# Altium PCB High Precision Laboratory Voltage Calibrator.PcbDoc
Units mm, origin at the board's own origin, x right, y up, seen from the top; angles counter-clockwise.
Board outline 80 x 60 mm, 2 copper layers (Top Layer, Bottom Layer); 18 components, 17 nets, 52 pads, 0 vias.
Unrouted connection lines stored in the file: 35.
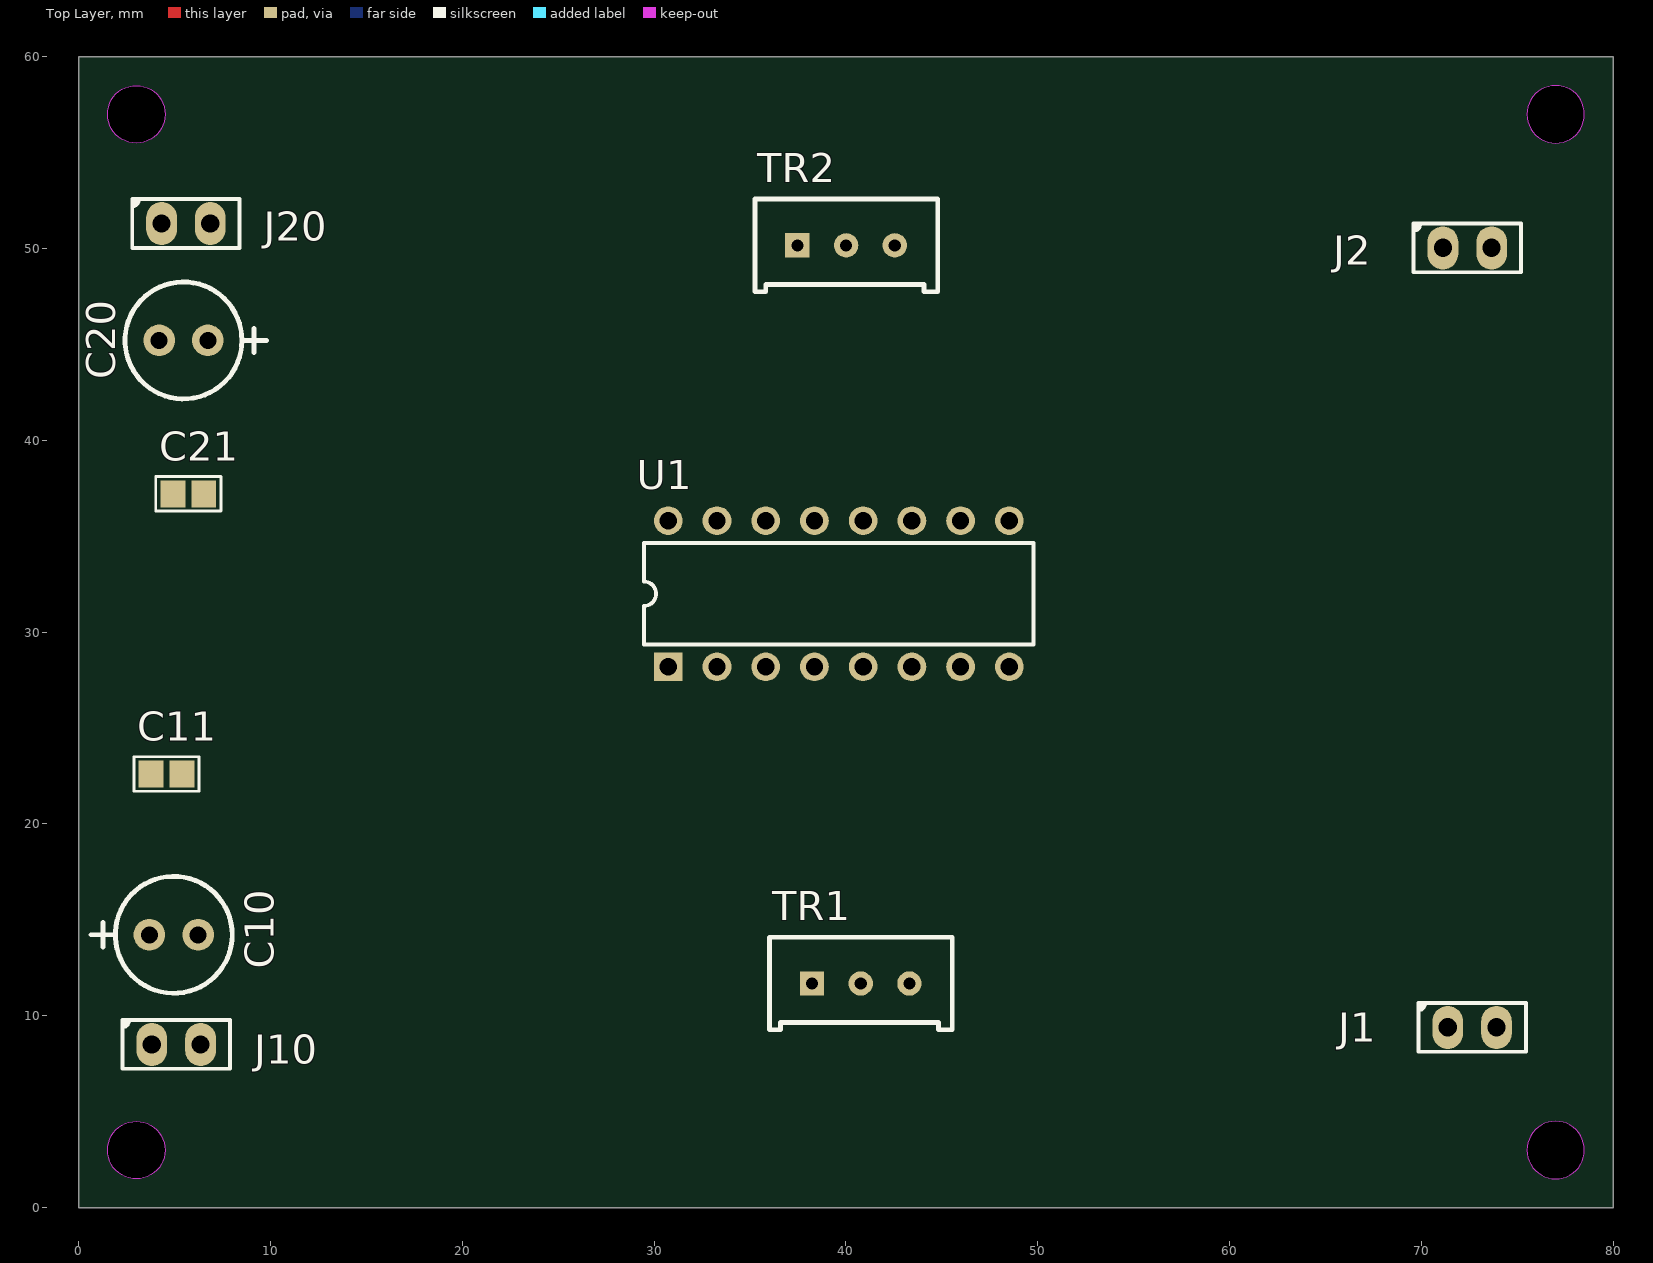
[diagram p0: Top Layer view]
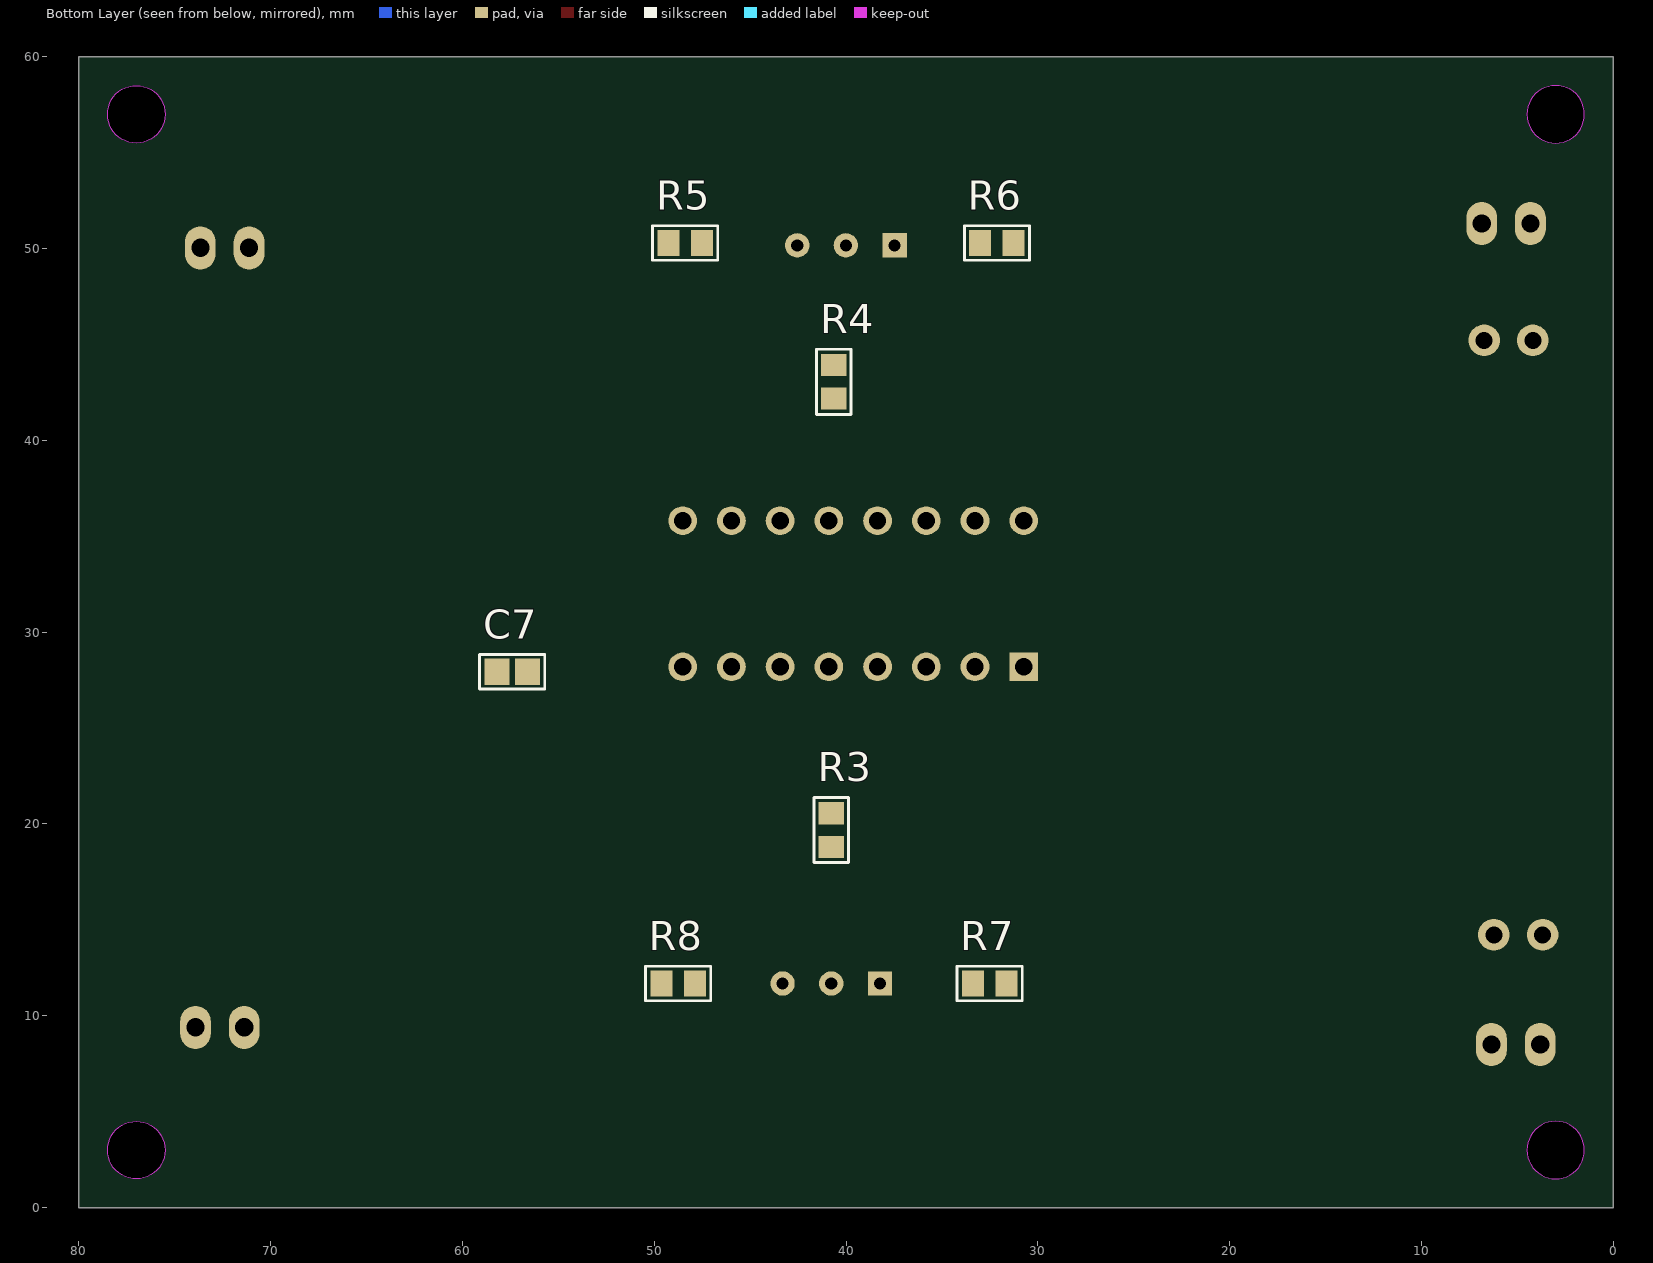
[diagram p1: Bottom Layer view, seen from below]

## Layer stack, top to bottom
Top Solder: solder mask 0.0102, Solder Resist, Dk 3.5
Top Layer: signal copper 0.0356
Dielectric 1: dielectric 0.32, FR-4, Dk 4.8
Bottom Layer: signal copper 0.0356
Bottom Solder: solder mask 0.0102, Solder Resist, Dk 3.5

## Board outline
0,0 80,0 80,60 0,60
cut-out: 3,55.5 cw(c3,57) 1.5,57 cw(c3,57) 3,58.5 cw(c3,57) 4.5,57 cw(c3,57)
cut-out: 75.5,57 ccw(c77,57) 77,55.5 ccw(c77,57) 78.5,57 ccw(c77,57) 77,58.5 ccw(c77,57)
cut-out: 75.5,3 ccw(c77,3) 77,1.5 ccw(c77,3) 78.5,3 ccw(c77,3) 77,4.5 ccw(c77,3)
cut-out: 3,1.5 cw(c3,3) 1.5,3 cw(c3,3) 3,4.5 cw(c3,3) 4.5,3 cw(c3,3)

## Design rules (kind name [scope] priority, off if disabled: settings)
Clearance [All] p1: gap=0.254 ignorepadtopadclearanceinfootprint=FALSE except(0: Arc-Hole Track-Hole SMDPad-Hole THPad-Hole Via-Hole Fill-Hole Poly-Hole Region-Hole Text-Hole)
PolygonConnect [All] p1: connectstyle=Relief reliefconductorwidth=0.254 reliefentries=4 polygonreliefangle="90 Angle" airgapwidth=0.254
RoutingVias [All] p1: holewidth=0.711 width=1.27 viastyle="Through Hole" minholewidth=0.711 minwidth=1.27 maxholewidth=0.711 maxwidth=1.27
SolderMaskExpansion [All] p1: expansion=0.102
Width [All] p1: maxlimit=0.254 minlimit=0.254 preferedwidth=0.254
30 further rules are at their usual default settings.

## Components (designator, comment, footprint, x,y, rotation, side; value= is the part's Value field where it differs from the comment)
C7 "1uF" "CAP 0805/2012" 57.404,27.94 r180 bottom value=0.1uF
C10 "10u" RB.1/.2-CAP-POL 3.683,14.224 r0 top value=10uF
C11 "100n" "CAP 0805/2012" 4.572,22.606 r0 top value=0.1uF
C20 "10u" RB.1/.2-CAP-POL 6.731,45.212 r180 top value=10uF
C21 "100n" "CAP 0805/2012" 5.715,37.211 r0 top value=0.1uF
J1 "+10.000V" "SAMTEC SSW-102-03-T-S" 72.644,9.398 r0 top
J2 "+5.000V" "SAMTEC SSW-102-03-T-S" 72.39,50.038 r0 top
J10 "+15V" "SAMTEC SSW-102-03-T-S" 5.08,8.509 r0 top
J20 "-15V" "SAMTEC SSW-102-03-T-S" 5.588,51.308 r0 top
R3 "470k" "RES 0805/2012" 40.767,19.685 r270 bottom value=1K
R4 "10k" "RES 0805/2012" 40.64,43.053 r270 bottom value=1K
R5 "22k" "RES 0805/2012" 48.387,50.292 r180 bottom value=1K
R6 "22k" "RES 0805/2012" 32.131,50.292 r180 bottom value=1K
R7 "100k" "RES 0805/2012" 32.512,11.684 r180 bottom value=1K
R8 "220k" "RES 0805/2012" 48.754,11.684 r180 bottom value=1K
TR1 "20k - Gain Adj" "Bourns 3296w" 38.227,11.684 r0 top
TR2 "20k - Balance Adj" "Bourns 3296w" 37.465,50.165 r0 top
U1 "AD588KQ" DIP16-300 39.624,32.004 r0 top

## Footprints (in the part's own frame and the unit in brackets; to place one, negate y for a bottom-side part, rotate by r counter-clockwise, add the part's x,y. Pads: shape width x height; smd on the part's side, far side on the other; paste and mask are expansions set on the pad)
"Bourns 3296w" [mm]
  rect 1.27x1.27 hole 0.635: 1(0,0)
  round 1.27 hole 0.635: 2(2.54,0) 3(5.08,0)
  silkscreen extent -2.21,-2.41 7.32,2.41, body extent -2.29,-2.41 7.24,2.41, height 11.68
"CAP 0805/2012" [mm] "Chip Capacitor, 2-Leads, Body 2.00x1.20mm, IPC Medium Density"
  rect 1.3x1.4 smd: 1(-0.8,0) 2(0.8,0)
  silkscreen extent -1.7,-0.9 1.7,0.9, body extent -1,-0.64 1,0.64, height 1.26
DIP16-300 [mm] "DIP, Molded; 16 Leads; Row Spacing 7.62 mm; Pitch 2.54 mm"
  rect 1.5x1.5 hole 0.9: 1(-8.89,-3.81)
  round 1.5 hole 0.9: 2(-6.35,-3.81) 3(-3.81,-3.81) 4(-1.27,-3.81) 5(1.27,-3.81) 6(3.81,-3.81) 7(6.35,-3.81) 8(8.89,-3.81) 9(8.89,3.81) 10(6.35,3.81) 11(3.81,3.81) 12(1.27,3.81) 13(-1.27,3.81) 14(-3.81,3.81) 15(-6.35,3.81) 16(-8.89,3.81)
  silkscreen extent -10.16,-2.65 10.16,2.65, body extent -10.79,-3.94 10.79,3.94, height 4.44
RB.1/.2-CAP-POL [mil]
  round 65 hole 35: 1(0,0) 2(100,0)
  silkscreen extent -120,-120 170,120, body extent -74,-125 174,123, height 445
"RES 0805/2012" [mm] "Chip Resistor, 2-Leads, Body 2.00x1.25mm, IPC Medium Density"
  rect 1.15x1.35 smd: 1(-0.875,0) 2(0.875,0)
  silkscreen extent -1.7,-0.9 1.7,0.9, body extent -0.95,-0.62 1.05,0.63, height 0.6
"SAMTEC SSW-102-03-T-S" [mm]
  oval 1.6x2.25 hole 0.95: 1(-1.27,0) 2(1.27,0)
  silkscreen extent -2.8,-1.27 2.8,1.27, body extent -2.79,-1.21 2.79,1.21, height 8.51

## Part data
C7 C11 C21: library part Capacitor, "SMT Capacitor"
C10 C20: library part "Capacitor POL RAD", "RAD Polarised Capacitor"
J1 J2 J10 J20: library part "1x2 Pin Header - SAMTEC SULLINS"
R3 R4 R5 R6 R7 R8: library part Resistor, "SMT Resistor"
TR1 TR2: library part "Trimmers 1", "Trimmers 1"
U1: "Multiple Output, High Precision, / Dual-Tracking Reference"

## Nets (pads, with @x,y where several pads share a name; then routed paths per layer and width w, separated by ;. In a path a pad name is that pad's centre, name@x,y a point inside that pad or via, vN(x,y) a via of type N, cw(c..) or ccw(c..) an arc to the next point about the centre after c; other vN are vias at no path point)
GND: C7.1 C10.2 C11.1 C20.1 C21.2 J1.2 J2.2 J10.2 J20.2 U1.9
NetC7_2: C7.2 U1.7
NetC10_1: C10.1 C11.2 J10.1 U1.2
NetC20_2: C20.2 C21.1 J20.1 U1.16
NetJ1_1: J1.1 U1.1 U1.3
NetJ2_1: J2.1 U1.14 U1.15
NetR3_1: R3.1 U1.5
NetR3_2: R3.2 TR1.2
NetR4_1: R4.1 TR2.2
NetR4_2: R4.2 U1.12
NetR5_1: R5.1 R8.1 U1.8 U1.10
NetR5_2: R5.2 TR2.3
NetR6_1: R6.1 TR2.1
NetR6_2: R6.2 R7.2 U1.4 U1.6
NetR7_1: R7.1 TR1.1
NetR8_2: R8.2 TR1.3
NetU1_11: U1.11 U1.13

## Other copper
Top Layer:
  pour cut-out: 3,1.5 cw(c3,3) 1.5,3 cw(c3,3) 3,4.5 cw(c3,3) 4.5,3 cw(c3,3)